# Altium PCB PCB1.PcbDoc
Units mm, origin at the board's own origin, x right, y up, seen from the top; angles counter-clockwise.
Board outline 41 x 58.5 mm, 2 copper layers (Top Layer, Bottom Layer); 36 components, 22 nets, 143 pads, 0 vias.
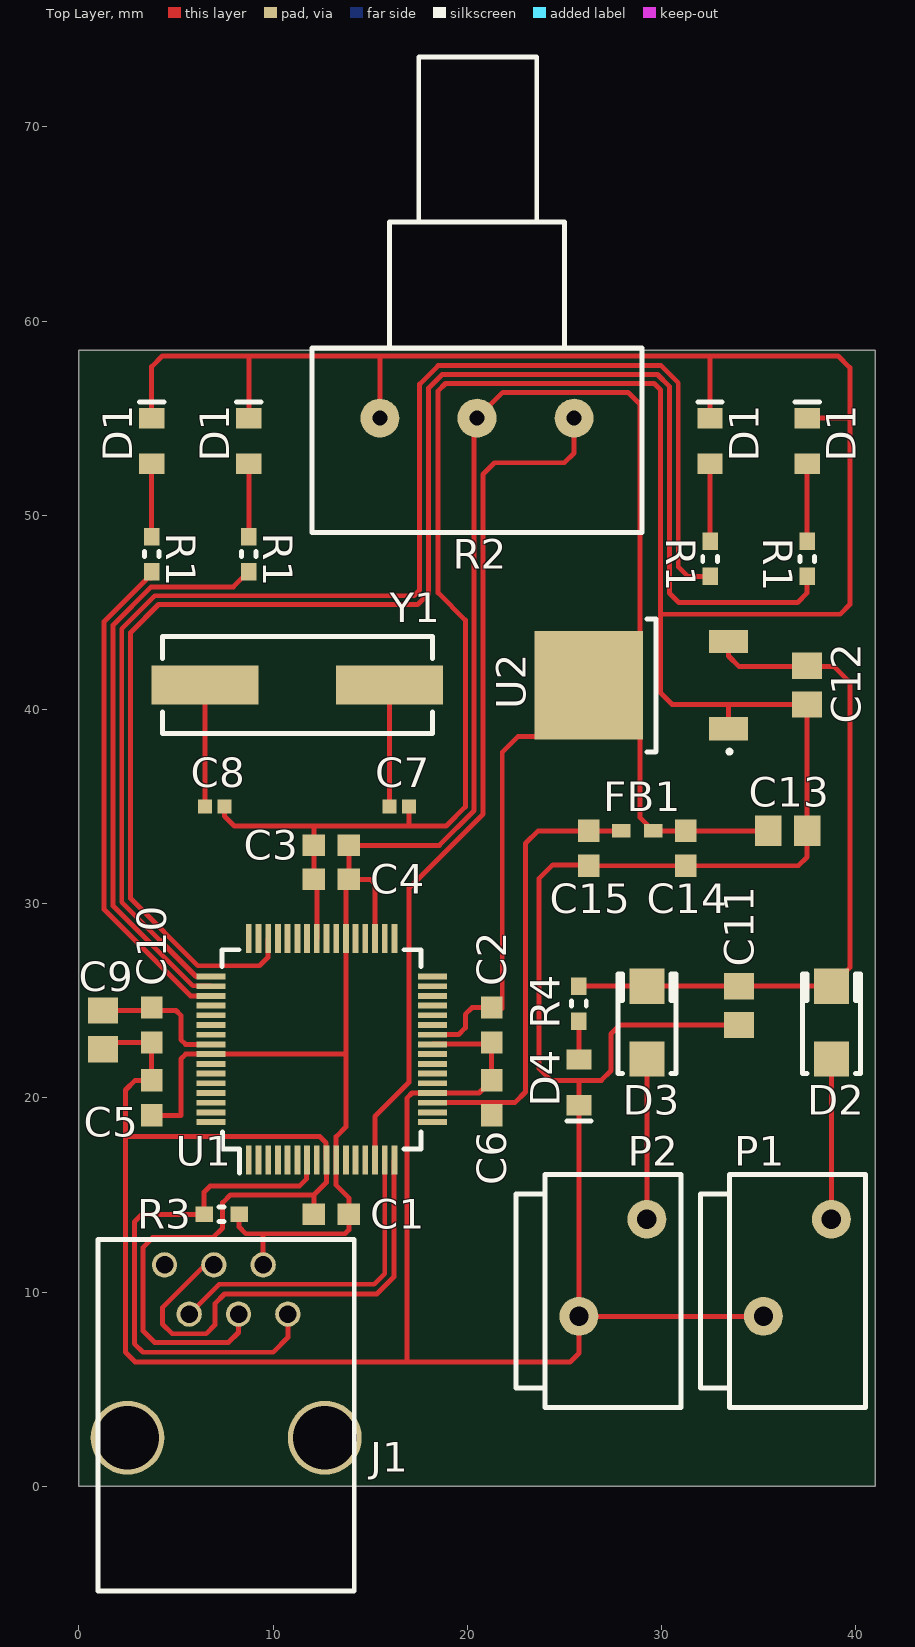
[diagram p0: Top Layer view]
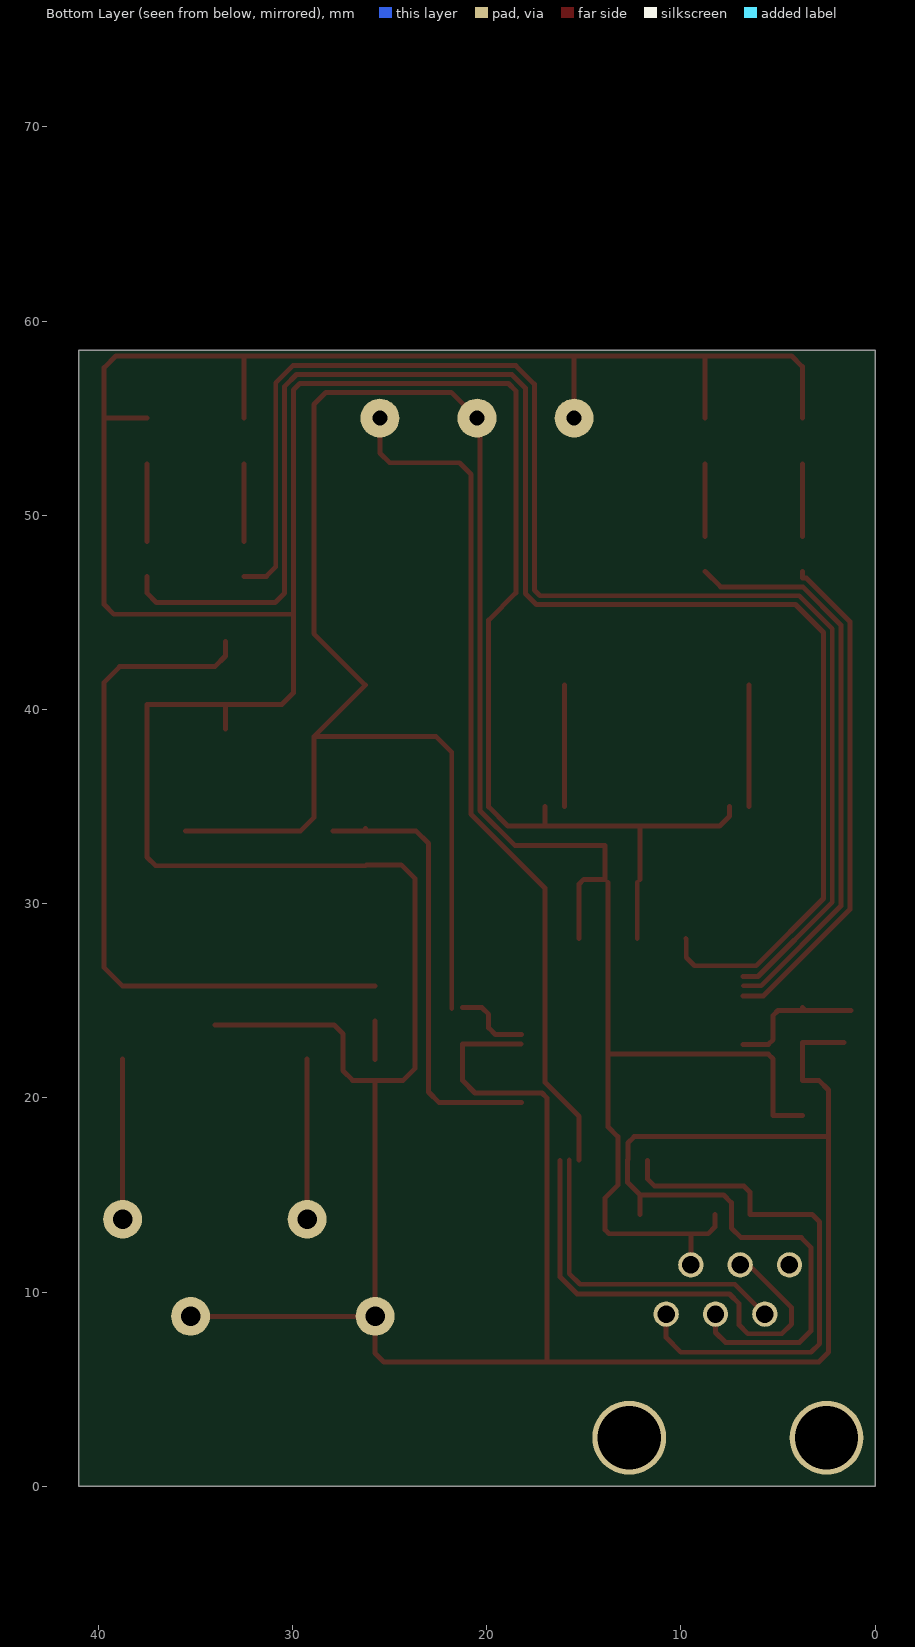
[diagram p1: Bottom Layer view, seen from below]

## Layer stack, top to bottom
Top Solder: solder mask 0.0102, Solder Resist, Dk 3.5
Top Layer: signal copper 0.0356
Dielectric 1: dielectric 0.32, FR-4, Dk 4.8
Bottom Layer: signal copper 0.0356
Bottom Solder: solder mask 0.0102, Solder Resist, Dk 3.5

## Board outline
0,0 41,0 41,58.5 0,58.5

## Design rules (kind name [scope] priority, off if disabled: settings)
Clearance [All] p1: gap=0.2
HoleSize [All] p1: absolutevalues=TRUE maxlimit=2.54 minlimit=0.3 maxpercent=80.000 minpercent=20.000
PolygonConnect [All] p1: connectstyle=Relief reliefconductorwidth=0.254 reliefentries=4 polygonreliefangle="90 Angle" airgapwidth=0.254
RoutingVias [All] p1: holewidth=0.711 width=1.27 viastyle="Through Hole" minholewidth=0.3 minwidth=1.27 maxholewidth=0.711 maxwidth=1.27
SolderMaskExpansion [All] p1: expansion=0.102
UnpouredPolygon [All] p1: allowunpoured=FALSE
Width [All] p1: maxlimit=0.254 minlimit=0.2 preferedwidth=0.254 minimp=50.000000 maximp=50.000000 favimp=50.000000
28 further rules are at their usual default settings.

## Classes and differential pairs
channel class LED: LED0 LED1 LED2 LED3
net class LED[0..3]: LED0 LED1 LED2 LED3
component class TP2: R2
component class POWER: C11 C12 C13 C14 C15 D2 D3 D4 FB1 P1 P2 R4
component class PIC: C1 C2 C3 C4 C5 C6 C7 C8 C9 C10 R3 U1 Y1
component class LED3: D1_LED1 R1_LED0

## Components (designator, comment, footprint, x,y, rotation, side; value= is the part's Value field where it differs from the comment)
C1 "100nF" CAPC1608N 13,14 r0 top
C2 "100nF" CAPC1608N 21.25,23.75 r90 top
C3 "100nF" CAPC1608N 13,33 r0 top
C4 "100nF" CAPC1608N 13,31.25 r0 top
C5 "100nF" CAPC1608N 3.75,20 r270 top
C6 "100nF" CAPC1608N 21.25,20 r270 top
C7 "20pF" CAPC1005N 16.5,35 r0 top
C8 "20pF" CAPC1005N 7,35 r0 top
C9 "10uF" CAPC2012N 1.25,23.5 r90 top
C10 "1uF" CAPC1608N 3.75,23.75 r90 top
C11 "10uF" CAPC2012N 34,24.75 r90 top
C12 "10uF" CAPC2012N 37.5,41.25 r90 top
C13 "10uF" CAPC2012N 36.5,33.75 r180 top
C14 "1uF" CAPC1608N 31.25,32.85 r90 top
C15 "100nF" CAPC1608N 26.25,32.85 r90 top
D1 "Green LED" "LED 0805" 37.5,53.825 r90 top
D1 "Green LED" "LED 0805" 32.5,53.825 r90 top
D1 "Green LED" "LED 0805" 8.75,53.825 r90 top
D1 "Green LED" "LED 0805" 3.75,53.825 r90 top
D2 "GF1A" SMA/DO-214AC_21 38.75,23.875 r90 top
D3 "GF1A" SMA/DO-214AC_21 29.25,23.875 r90 top
D4 "Green LED" "LED 0805" 25.75,20.8 r270 top
FB1 "600r" INDC1608AN 28.75,33.75 r180 top
J1 "Program / Debug" "RJ12_90  1-215876-3" 12.66,2.5 r270 top
P1 "12V Main" PHOENIX_1985195 37,11.25 r0 top
P2 "12V Battery" PHOENIX_1985195 27.5,11.25 r0 top
R1 "330r" RESC1608N 37.5,47.75 r270 top
R1 "330r" RESC1608N 32.5,47.75 r270 top
R1 "330r" RESC1608N 8.75,48 r270 top
R1 "330r" RESC1608N 3.75,48 r270 top
R2 "1K" PDB181-K415K-102A2 20.5,55 r0 top
R3 "4.7k" RESC1608N 7.35,14 r0 top
R4 "470r" RESC1608N 25.75,24.85 r90 top
U1 "PIC32MX764F128H-I/PT" QFP50P1200X1200X120-64 12.5,22.5 r90 top
U2 "AP1117" TD03B_N 26.25,41.25 r90 top
Y1 "8MHz" "HC49/4H SMX CRYSTAL" 11.25,41.25 r0 top

## Footprints (in the part's own frame and the unit in brackets; to place one, negate y for a bottom-side part, rotate by r counter-clockwise, add the part's x,y. Pads: shape width x height; smd on the part's side, far side on the other; paste and mask are expansions set on the pad)
CAPC1005N [mm]
  rect 0.72x0.72 smd: 1(-0.5,0) 2(0.5,0)
CAPC1608N [mm]
  rect 1.15x1.1 smd: 1(-0.9,0) 2(0.9,0)
CAPC2012N [mm]
  rect 1.35x1.55 smd: 1(-1,0) 2(1,0)
"HC49/4H SMX CRYSTAL" [mm]
  rect 5.5x2 smd: 1(-4.75,0) 2(4.75,0)
  silkscreen extent -6.95,-2.5 6.95,2.5
INDC1608AN [mm]
  rect 0.95x0.7 smd: 1(-0.825,0) 1(-0.825,0) 2(0.825,0)
"LED 0805" [mm]
  rect 1.05x1.3 smd: 1(-1.175,0) 2(1.175,0)
  silkscreen extent 2,-0.63 2,0.63
PDB181-K415K-102A2 [mm]
  round 2 hole 0.762: 1(-5,0) 2(0,0) 3(5,0)
  silkscreen extent -8.5,-5.9 8.5,18.6
PHOENIX_1985195 [mm]
  round 2 hole 1: 1(1.75,2.5) 2(-1.75,-2.5)
  silkscreen extent -5,-7.2 3.5,4.8
QFP50P1200X1200X120-64 [mm]
  rect 1.5x0.3 smd: 1(-5.7,3.75) 2(-5.7,3.25) 3(-5.7,2.75) 4(-5.7,2.25) 5(-5.7,1.75) 6(-5.7,1.25) 7(-5.7,0.75) 8(-5.7,0.25) 9(-5.7,-0.25) 10(-5.7,-0.75) 11(-5.7,-1.25) 12(-5.7,-1.75) 13(-5.7,-2.25) 14(-5.7,-2.75) 15(-5.7,-3.25) 16(-5.7,-3.75) 33(5.7,-3.75) 34(5.7,-3.25) 35(5.7,-2.75) 36(5.7,-2.25) 37(5.7,-1.75) 38(5.7,-1.25) 39(5.7,-0.75) 40(5.7,-0.25) 41(5.7,0.25) 42(5.7,0.75) 43(5.7,1.25) 44(5.7,1.75) 45(5.7,2.25) 46(5.7,2.75) 47(5.7,3.25) 48(5.7,3.75)
  rect 0.3x1.5 smd: 17(-3.75,-5.7) 18(-3.25,-5.7) 19(-2.75,-5.7) 20(-2.25,-5.7) 21(-1.75,-5.7) 22(-1.25,-5.7) 23(-0.75,-5.7) 24(-0.25,-5.7) 25(0.25,-5.7) 26(0.75,-5.7) 27(1.25,-5.7) 28(1.75,-5.7) 29(2.25,-5.7) 30(2.75,-5.7) 31(3.25,-5.7) 32(3.75,-5.7) 49(3.75,5.7) 50(3.25,5.7) 51(2.75,5.7) 52(2.25,5.7) 53(1.75,5.7) 54(1.25,5.7) 55(0.75,5.7) 56(0.25,5.7) 57(-0.25,5.7) 58(-0.75,5.7) 59(-1.25,5.7) 60(-1.75,5.7) 61(-2.25,5.7) 62(-2.75,5.7) 63(-3.25,5.7) 64(-3.75,5.7)
  silkscreen extent -6.38,-5.13 5.13,5.13
RESC1608N [mm]
  rect 0.9x0.8 smd: 1(-0.9,0) 2(0.9,0)
  silkscreen extent -0.13,-0.38 0.13,0.38
"RJ12_90  1-215876-3" [mm]
  round 1.3 hole 0.9: 1(-6.36,-1.9) 2(-8.9,-3.17) 3(-6.36,-4.44) 4(-8.9,-5.71) 5(-6.36,-6.98) 6(-8.9,-8.25)
  round 3.8 hole 3.25: 11(0,0) 11(0,-10.16)
  silkscreen extent -10.2,-11.68 7.9,1.52
SMA/DO-214AC_21 [mm]
  rect 1.82x1.8 smd: 1(-1.875,0) 2(1.875,0)
  silkscreen extent -2.63,-1.5 2.5,1.5
TD03B_N [mm]
  rect 1.2x2 smd: 1(-2.25,-7.2) 3(2.25,-7.2)
  rect 5.6x5.6 smd: 2(0,0)
  silkscreen extent -3.5,-7.33 3.4,-3

## Part data
C1 C2 C3 C4 C5 C6 C7 C8 C9 C10 C11 C12 C13 C14 C15: library part Cap, "Capacitor"
D1 D1 D1 D1: library part LED0, "Typical INFRARED GaAs LED"
D2 D3: library part Diode, "Default Diode"
D4: library part LED2, "Typical RED, GREEN, YELLOW, AMBER GaAs LED"
FB1: library part Inductor, "Inductor"
J1: library part "Header 6", "Header, 6-Pin"
P1 P2: library part "Header 2", "Header, 2-Pin"
R1 R1 R1 R1 R3 R4: library part Res1, "Resistor"
R2: library part RPot, "Potentiometer"
U1: "PIC32MX764F128H"
U2: "1A LDO, 18V input, DPAK"
Y1: library part XTAL, "Crystal Oscillator"

## Nets (pads, with @x,y where several pads share a name; then routed paths per layer and width w, separated by ;. In a path a pad name is that pad's centre, name@x,y a point inside that pad or via, vN(x,y) a via of type N, cw(c..) or ccw(c..) an arc to the next point about the centre after c; other vN are vias at no path point)
ALIM: D2.1 P1.1 | length 8.2
  Top Layer w0.254: P1.1 D2.1
BATTERY: D3.1 P2.1 | length 8.2
  Top Layer w0.254: P2.1 D3.1
GND: C1.1 C2.1 C3.1 C4.1 C5.1 C6.1 C7.2 C8.2 C9.1 C10.1 C11.1 C12.1 C13.1 C14.1 C15.1 D1.2 D4.2 J1.3 P1.2 P2.2 R2.1 U1.9 U1.20 U1.25 U1.41 U2.1 | length 321.8
  Top Layer w0.254: C9.1@1.6,22.85 C10.1 C5.1 2.9,20.9 2.4,20.4 2.4,18 ; D1.2@3.75,55 3.75,57.65 4.3,58.2 15.5,58.2 ; C8.2 7.5,34.5 8,34 12.1,34 ; J1.3@8.314,8.86 J1.3 8.22,7.92 7.7,7.4 3.9,7.4 3.308,7.992 3.308,12.308 3.8,12.8 6.9,12.8 7.4,13.3 7.4,14.6 7.8,15 12.1,15 ; D1.2@8.75,55 8.75,58.2 ; C1.1 12.1,15 ; C4.1 C3.1 12.1,34 ; U1.41 C4.1@12.25,31.1 ; U1.9@12.727,16.823 12.727,17.685 12.412,18 2.4,18 ; U1.9 12.75,15.65 12.1,15 ; R2.1 15.5,58.2 ; C7.2 17,34 ; U1.25@18.223,22.773 21.25,22.773 C6.1 20.6,20.25 U1.20 17.15,20.25 16.9,20 16.9,6.4 ; C15.1@26.2,32 24.4,32 23.7,31.3 23.7,21.5 24.3,20.9 25.75,20.9 ; C15.1 C14.1 37.05,31.95 37.5,32.4 C13.1 C12.1 30.55,40.25 29.946,40.854 29.946,43.088 29.954,43.096 29.954,44.9 ; D1.2@32.5,55 32.5,58.2 ; U2.1 33.45,40.25 ; C11.1 27.85,23.75 27.4,23.3 27.4,21.4 26.9,20.9 25.75,20.9 ; P1.2 P2.2 ; D1.2@37.5,55 39.7,55 ; 2.4,18 2.4,6.9 2.9,6.4 16.9,6.4 ; 12.1,34 17,34 ; 15.5,58.2 32.5,58.2 ; 16.9,6.4 25.3,6.4 25.75,6.85 P2.2 ; 17,34 18.916,34 19.9,34.984 19.9,44.6 18.5,46 18.5,56.4 18.881,56.781 29.619,56.781 29.954,56.446 29.954,44.9 ; P2.2 D4.2 25.75,20.9 ; 29.954,44.9 39.2,44.9 39.7,45.4 39.7,57.6 39.1,58.2 32.5,58.2
LED0: R1.2@37.5,46.85 U1.46 | length 82.1
  Top Layer w0.254: U1.46 9.727,28.177 9.727,27.227 9.3,26.8 6.126,26.8 2.662,30.264 2.662,43.962 4.1,45.4 17.442,45.4 18,45.958 18,56.542 18.704,57.246 29.796,57.246 30.408,56.634 30.408,45.992 30.9,45.5 37,45.5 37.5,46 R1.2@37.5,46.85
LED1: R1.2@32.5,46.85 U1.49 | length 72.4
  Top Layer w0.254: U1.49 6.034,26.25 2.208,30.076 2.208,44.15 3.912,45.854 17.254,45.854 17.546,46.146 17.546,56.746 18.5,57.7 29.984,57.7 30.862,56.822 30.862,47.338 31.35,46.85 R1.2@32.5,46.85
LED2: R1.2@8.75,47.1 U1.50 | length 29.3
  Top Layer w0.254: U1.50@6.777,25.773 5.869,25.773 1.754,29.888 1.754,44.338 3.724,46.308 7.958,46.308 R1.2@8.75,47.1
LED3: R1.2@3.75,47.1 U1.51 | length 25.9
  Top Layer w0.254: R1.2@3.75,47.1 3.75,46.762 3.536,46.762 1.3,44.526 1.3,29.7 5.75,25.25 U1.51
MCLR: J1.1 R3.1 U1.7 | length 27.3
  Top Layer w0.254: J1.1 10.76,7.66 10,6.9 3.3,6.9 2.854,7.346 2.854,13.604 3.25,14 R3.1 6.45,15.15 6.754,15.454 11.354,15.454 11.727,15.827 U1.7@11.727,16.777
NetC9_2: C9.2 C10.2 U1.56 | length 7.2
  Top Layer w0.254: C9.2 C10.2@3.6,24.5 ; C10.2 C10.2@3.6,24.5 ; U1.56 5.5,22.75 5.25,23 5.25,24.25 5,24.5 C10.2@3.6,24.5
NetD1_LED0_1: D1.1@37.5,52.65 R1.1@37.5,48.65 | length 4
  Top Layer w0.254: R1.1@37.5,48.65 D1.1@37.5,52.65
NetD1_LED1_1: D1.1@32.5,52.65 R1.1@32.5,48.65 | length 4
  Top Layer w0.254: R1.1@32.5,48.65 D1.1@32.5,52.65
NetD1_LED2_1: D1.1@8.75,52.65 R1.1@8.75,48.9 | length 3.8
  Top Layer w0.254: R1.1@8.75,48.9 D1.1@8.75,52.65
NetD1_LED3_1: D1.1@3.75,52.65 R1.1@3.75,48.9 | length 3.8
  Top Layer w0.254: R1.1@3.75,48.9 D1.1@3.75,52.65
NetD4_1: D4.1 R4.1 | length 2
  Top Layer w0.254: D4.1 R4.1
NetR2_3: R2.3 U1.14 | length 44.6
  Top Layer w0.254: U1.14 15.25,19.05 17,20.8 17,30.8 20.808,34.608 20.808,52.108 21.4,52.7 25,52.7 25.5,53.2 R2.3
PGC: J1.5 U1.15 | length 16.8
  Top Layer w0.254: J1.5@5.68,8.82 J1.5 7.22,10.4 15.2,10.4 15.75,10.95 U1.15
PGD: J1.4 U1.16 | length 24.4
  Top Layer w0.254: J1.4@6.95,11.45 J1.4 6.5,11.4 4.3,9.2 4.3,8.354 4.8,7.854 6.554,7.854 7,8.3 7,9.4 7.5,9.9 15.342,9.9 16.227,10.785 U1.16@16.227,16.777
V3P3: C1.2 C2.2 C3.2 C4.2 C5.2 C13.2 C14.2 FB1.1 J1.2 R2.2 R3.2 U1.10 U1.26 U1.35 U1.38 U1.57 U2.2 | length 137.1
  Top Layer w0.254: C5.2 5.25,19.1 5.25,22 5.5,22.25 U1.57 13.7,22.25 ; R3.2 8.25,13.35 8.6,13 13.7,13 13.9,13.2 C1.2 13.9,14.85 13.25,15.5 U1.10 13.25,18 13.75,18.5 U1.38 C4.2@13.75,31.1 ; J1.2 9.49,12.99 ; U1.35 15.25,31 15,31.25 C4.2 C3.2 18.558,33 20.354,34.796 20.354,54.854 R2.2 21.827,56.327 28.273,56.327 28.9,55.7 28.9,43.9 U2.2 U2.2@28.9,38.6 ; U1.26 19.55,23.25 19.9,23.6 19.9,24.3 20.25,24.65 C2.2 ; C2.2@21.8,24.6 21.8,37.8 22.6,38.6 U2.2@28.9,38.6 ; C13.2 C14.2 29.575,33.75 28.9,34.425 U2.2@28.9,38.6
V3P3A: C6.2 C15.2 FB1.2 U1.19 | length 25.5
  Top Layer w0.254: 20.6,19.75 U1.19 22.45,19.75 23,20.3 23,33.1 23.65,33.75 C15.2 ; C15.2@26.25,33.877 C15.2 ; FB1.2 C15.2
V5: C11.2 C12.2 D2.2 D3.2 R4.2 U2.3 | length 36.6
  Top Layer w0.254: R4.2 D3.2 C11.2 D2.2 39.7,26.7 39.7,41.4 38.9,42.2 34,42.2 33.45,42.75 U2.3
X1: C7.1 Y1.2 | length 6.2
  Top Layer w0.254: C7.1 Y1.2
X2: C8.1 Y1.1 | length 6.2
  Top Layer w0.254: C8.1 Y1.1
pads on no net: J1.6 J1.11 U1.1 U1.2 U1.3 U1.4 U1.5 U1.6 U1.8 U1.11 U1.12 U1.13 U1.17 U1.18 U1.21 U1.22 U1.23 U1.24 U1.27 U1.28 U1.29 U1.30 U1.31 U1.32 U1.33 U1.34 U1.36 U1.37 U1.39 U1.40 U1.42 U1.43 U1.44 U1.45 U1.47 U1.48 U1.52 U1.53 U1.54 U1.55 U1.58 U1.59 U1.60 U1.61 U1.62 U1.63 U1.64